# Altium PCB LM2587.PcbDoc
Units mm, origin at the board's own origin, x right, y up, seen from the top; angles counter-clockwise.
Board outline 50 x 35 mm, 2 copper layers (Top Layer, Bottom Layer), stack 1.581 mm thick; 11 components, 7 nets, 30 pads, 52 vias.
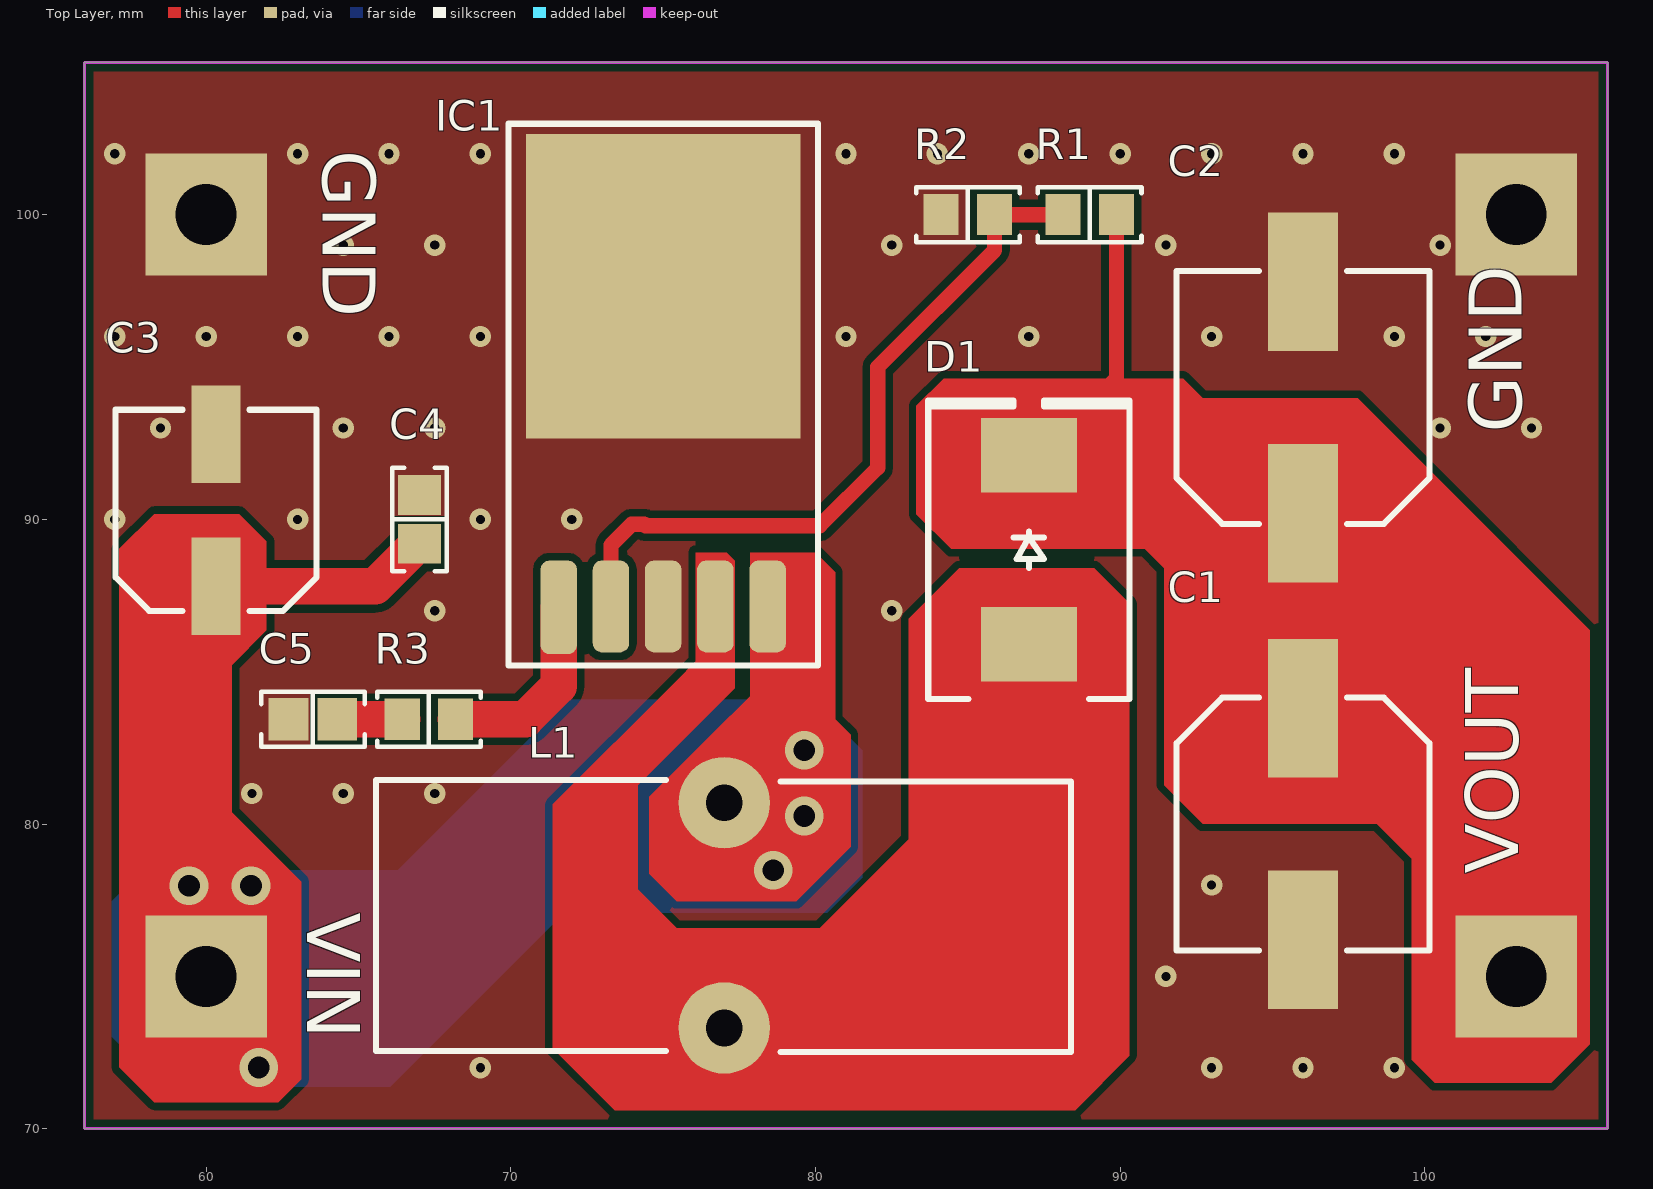
[diagram p0: Top Layer view]
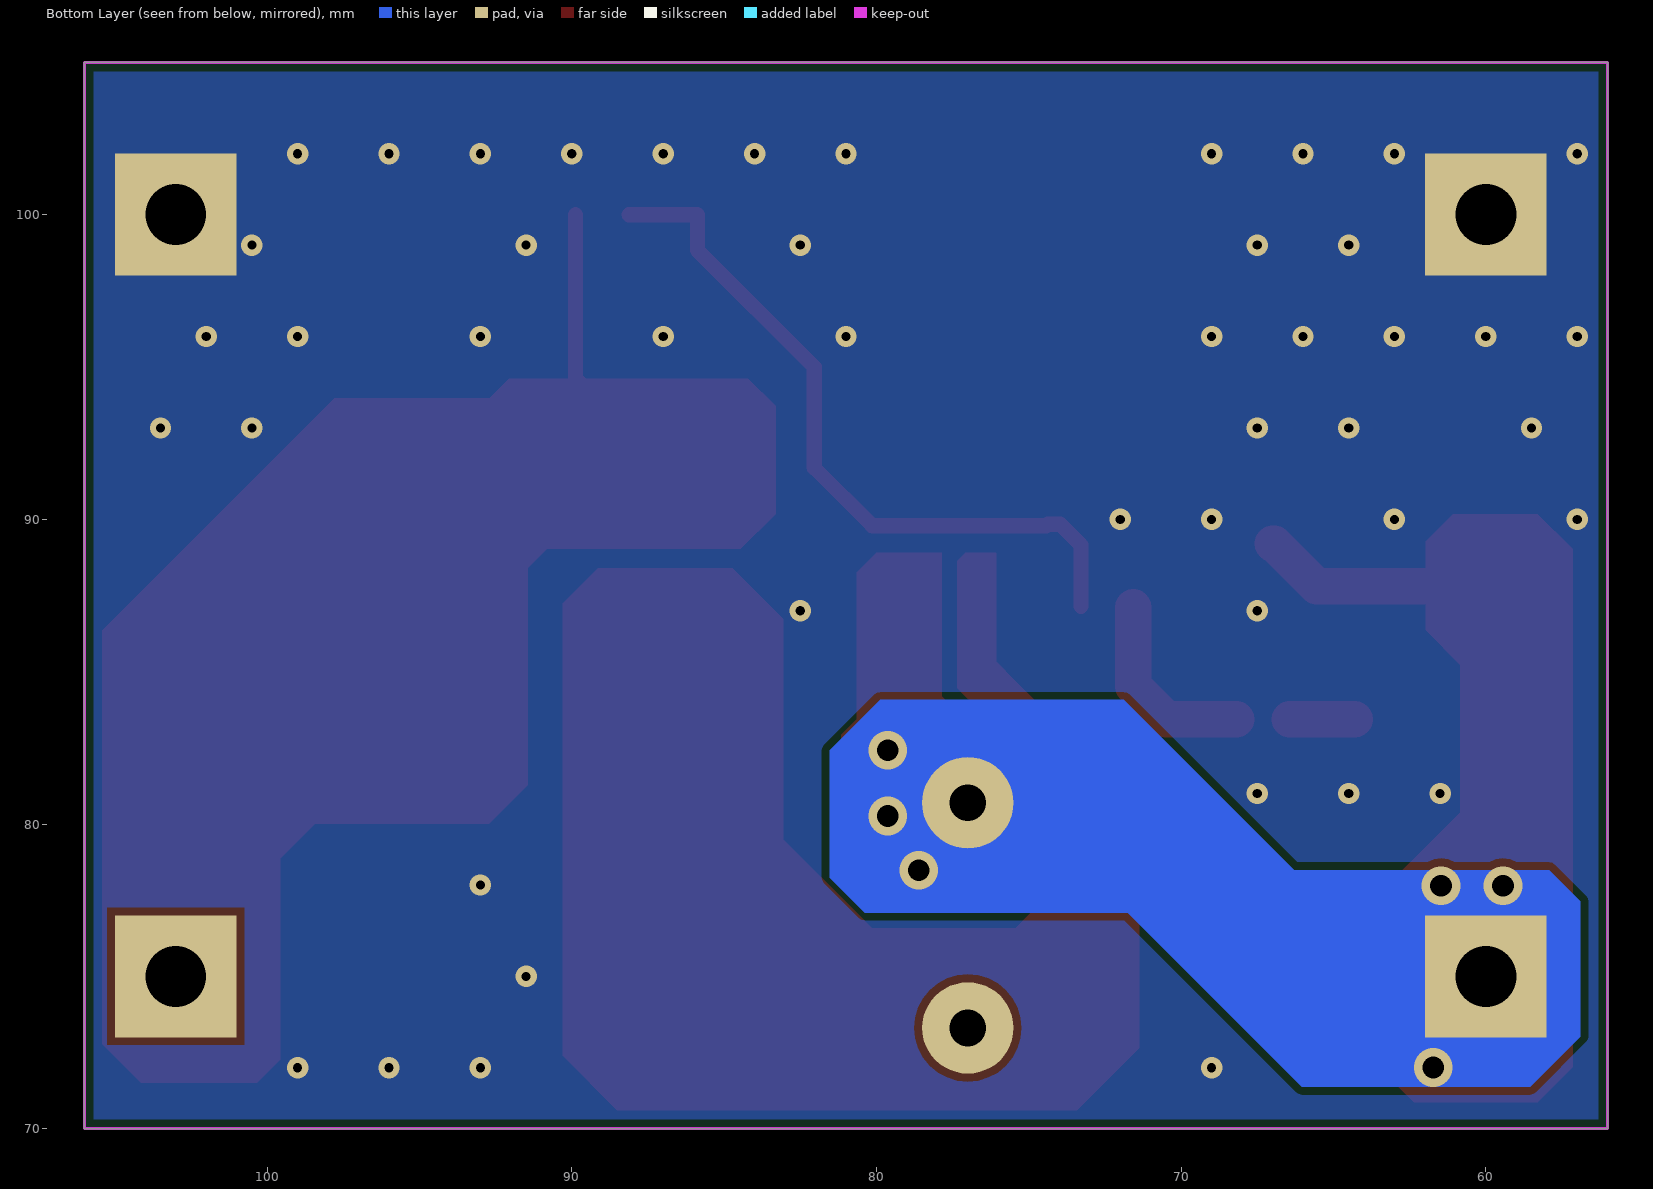
[diagram p1: Bottom Layer view, seen from below]
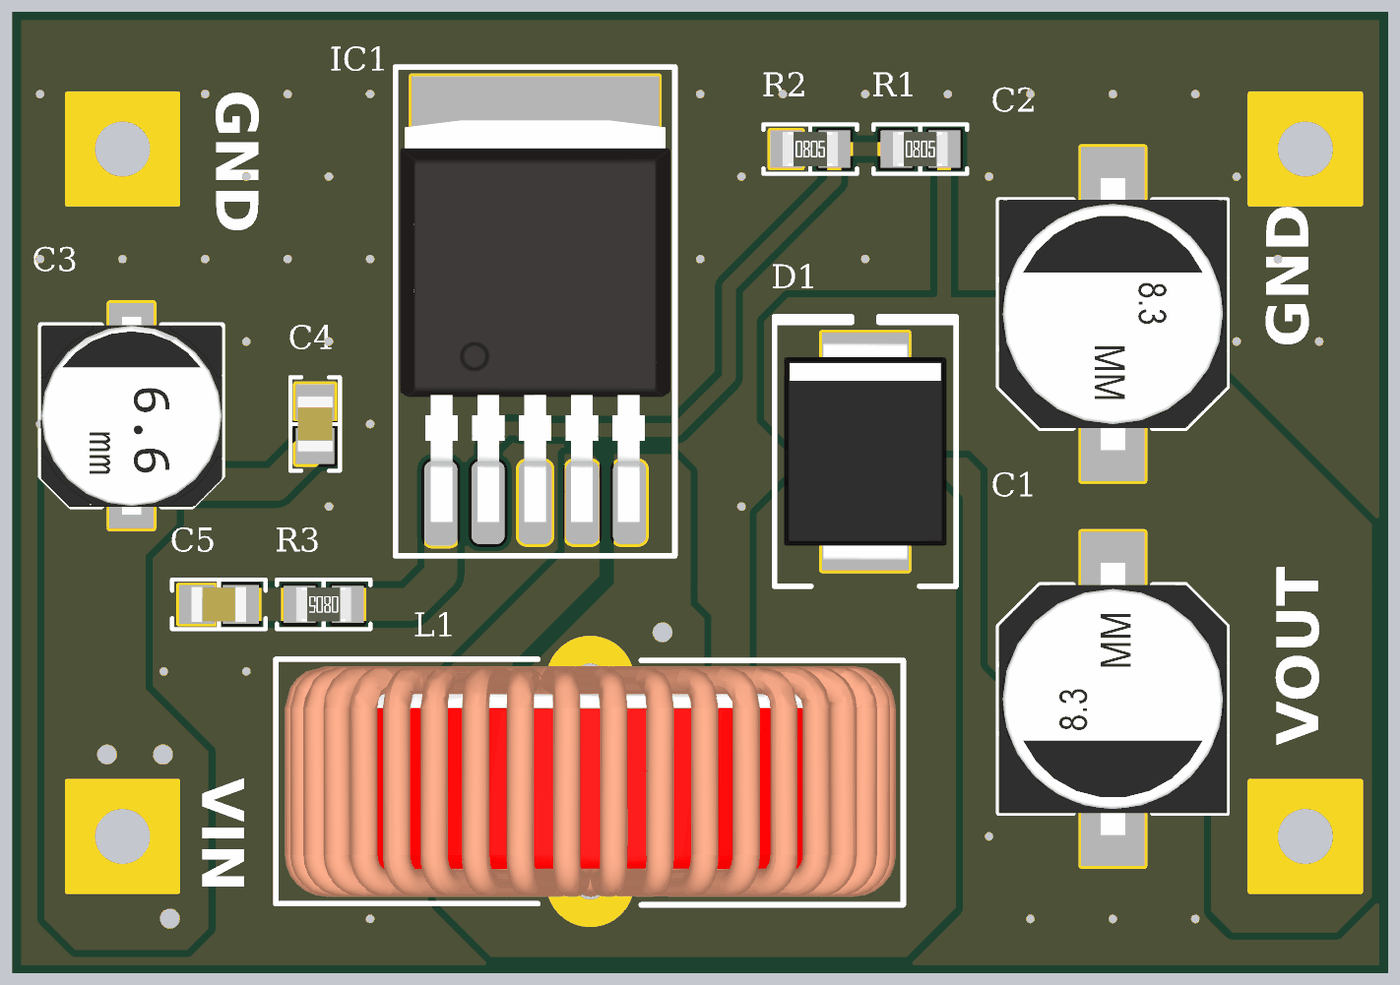
[diagram p2: 3D render of the assembled board from above, using the file's embedded part models]

## Layer stack, top to bottom
Top Solder: solder mask 0.0102, Solder Resist, Dk 3.5
Top Layer: signal copper 0.0356
Dielectric 1: dielectric 1.51, FR-4, Dk 4.8
Bottom Layer: signal copper 0.0356
Bottom Solder: solder mask 0.0102, Solder Resist, Dk 3.5

## Board outline
56,70 56,105 106,105 106,70

## Design rules (kind name [scope] priority, off if disabled: settings)
Clearance Clearance_1 [InPolygon] p1: gap=0.25 ignorepadtopadclearanceinfootprint=FALSE
Clearance [All] p2: gap=0.152 ignorepadtopadclearanceinfootprint=FALSE
PolygonConnect [All] p1: connectstyle=Direct reliefconductorwidth=0.254 reliefentries=4 polygonreliefangle="90 Angle" airgapwidth=0.254
RoutingVias [All] p1: holewidth=0.5 width=0.8 viastyle="Through Hole" minholewidth=0.3 minwidth=0.5 maxholewidth=1 maxwidth=2
SolderMaskExpansion [All] p1: expansion=0.102 istentingtop=FALSE
Width [All] p1: maxlimit=3 minlimit=0.152 preferedwidth=0.5
30 further rules are at their usual default settings.

## Components (designator, comment, footprint, x,y, rotation, side; value= is the part's Value field where it differs from the comment)
C1 "100µF" "CAP ALSMD 8.3MM H10.5MM" 96,80 r270 top
C2 "100µF" "CAP ALSMD 8.3MM H10.5MM" 96,94 r90 top
C3 "56µF" "CAP ALSMD 6.6MM H7.7MM" 60.325,90.297 r90 top
C4 "0.1µF" "CAP 0805_2012" 67,90 r270 top
C5 "0.68µF" "CAP 0805_2012" 63.5,83.439 r0 top
D1 "SURS8360T3G" "DO214AB SMC" 87,89 r90 top
IC1 "LM2587" D2PAK 75,96 r0 top
L1 "100µH" 7447070 77,77 r0 top
R1 "56 kOhms" "RES 0805_2012" 89,100 r0 top
R2 "2 kOhms" "RES 0805_2012" 85,100 r0 top
R3 "3 kOhms" "RES 0805_2012" 67.31,83.439 r180 top

## Footprints (in the part's own frame and the unit in brackets; to place one, negate y for a bottom-side part, rotate by r counter-clockwise, add the part's x,y. Pads: shape width x height; smd on the part's side, far side on the other; paste and mask are expansions set on the pad)
7447070 [mm] "0.984\" Dia x 0.433\" W (25.00mm x 11.00mm)"
  round 3 hole 1.2: 1(0,3.695) 2(0,-3.695)
  silkscreen extent -11.43,-4.49 11.38,4.44, body extent -11.11,-4.19 11.11,4.2, height 22.08
"CAP 0805_2012" [mm] "Chip Capacitor, 2-Leads, Body 2.00x1.20mm, IPC Medium Density"
  rect 1.3x1.4 smd: 1(-0.8,0) 2(0.8,0)
  silkscreen extent -1.7,-0.9 1.7,0.9, body extent -1,-0.64 1,0.64, height 1.26
"CAP ALSMD 6.6MM H7.7MM" [mm] "Aluminum Electrolytic Capacitor, Body 6.60x6.60x7.70mm, IPC Low Density"
  rect 3.2x1.6 smd: 1(-2.5,0) 2(2.5,0)
  silkscreen extent -3.3,-3.3 3.3,3.3, body extent -3.6,-3.3 3.6,3.3, height 7.7
"CAP ALSMD 8.3MM H10.5MM" [mm] "Aluminum Electrolytic Capacitor, Body 8.30x8.30x10.50mm, IPC Low Density"
  rect 4.55x2.3 smd: 1(-3.8,0) 2(3.8,0)
  silkscreen extent -4.15,-4.15 4.15,4.15, body extent -4.95,-4.15 4.95,4.15, height 10.5
D2PAK [mm]
  rrect50% 1.2x3.075 smd: 1(-3.429,-8.89)
  rrect50% 1.2x3.015 smd: 2(-1.714,-8.86) 3(0,-8.86) 4(1.714,-8.86) 5(3.429,-8.86)
  rect 9x10 smd: 3(0,1.651)
  silkscreen extent -5.08,-10.79 5.08,6.98, body extent -4.91,-9.56 4.91,5.04, height 4.22
"DO214AB SMC" [mm] "Molded Diode, 2-Leads, Body 6.85x5.90mm, IPC Medium Density"
  rect 2.45x3.15 smd: 1(-3.1,0) 2(3.1,0)
  silkscreen extent -4.9,-3.3 4.9,3.3, body extent -3.97,-2.95 3.97,2.95, height 2.6
"RES 0805_2012" [mm] "Chip Resistor, 2-Leads, Body 2.00x1.25mm, IPC Medium Density"
  rect 1.15x1.35 smd: 1(-0.875,0) 2(0.875,0)
  silkscreen extent -1.7,-0.9 1.7,0.9, body extent -1,-0.62 1,0.63, height 0.6

## Part data
C1 C2: library part EEE-FK1H101P, "CAP ALUM 100UF 20% 50V SMD", Device Package="Radial, Can - SMD", Lifetime @ Temp.="2000 Hrs @ 105°C", Manufacturer="Panasonic Electronic Components", Operating Temperature="-55°C ~ 105°C", Ratings=AEC-Q200, Ripple Current @ High Frequency="350mA @ 100kHz", Ripple Current @ Low Frequency="262.5mA @ 120Hz", Supplier Part Number 1=PCE3809CT-ND, Tolerance=±20%, Voltage - Rated=50V, Applications=Automotive, Capacitance=100µF, ComponentLink2Description="DigiKey Link", ComponentLink2URL=http://digikey.com/product-detail/en/panasonic-electronic-components/EEE-FK1H101P/PCE3809CT-ND/766185, Height - Seated (Max)="0.413\" (10.50mm)", Impedance="340 mOhms", LastUpdated="2020-09-02 01:25:16", Lifecycle Status=Active, Minimum Order=1, Mounting Type="Surface Mount", Package / Case="Radial, Can - SMD", Packaging=TapeAndReel, Part Number=EEE-FK1H101P, Part Status=Active, PartId=7485, Polarization=Polar, Price=0.25, Series=FK, Size / Dimension="0.315\" Dia (8.00mm)", Supplier 1=DigiKey, Surface Mount Land Size="0.327\" L x 0.327\" W (8.30mm x 8.30mm)"
C3: library part UWD1V560MCL1GS, "CAP ALUM 56UF 20% 35V SMD", Device Package="Radial, Can - SMD", Lifetime @ Temp.="2000 Hrs @ 105°C", Manufacturer=Nichicon, Operating Temperature="-55°C ~ 105°C", Ripple Current @ High Frequency="280mA @ 100kHz", Ripple Current @ Low Frequency="140mA @ 120Hz", Supplier Part Number 1=493-9694-1-ND, Tolerance=±20%, Voltage - Rated=35V, Applications="General Purpose", Capacitance=56µF, ComponentLink1Description=Datasheet, ComponentLink1URL=http://nichicon-us.com/english/products/pdfs/e-uwd.pdf, ComponentLink2Description="DigiKey Link", ComponentLink2URL=http://digikey.com/product-detail/en/nichicon/UWD1V560MCL1GS/493-9694-1-ND/3963026, Height - Seated (Max)="0.303\" (7.70mm)", Impedance="340 mOhms", LastUpdated="2020-09-02 01:25:35", Lifecycle Status=Active, Minimum Order=1, Mounting Type="Surface Mount", Package / Case="Radial, Can - SMD", Packaging=TapeAndReel, Part Number=UWD1V560MCL1GS, Part Status=Active, PartId=8221, Price=0.27, Series=UWD, Size / Dimension="0.248\" Dia (6.30mm)", Supplier 1=DigiKey, Surface Mount Land Size="0.260\" L x 0.260\" W (6.60mm x 6.60mm)"
C4: library part CC0805JRX7R9BB104, "CAP CER 0.1UF 50V X7R 0805", Device Package="0805 (2012 Metric)", Manufacturer=Yageo, Operating Temperature="-55°C ~ 125°C", Supplier Part Number 1=311-1858-1-ND, Temperature Coefficient=X7R, Tolerance=±5%, Voltage - Rated=50V, Applications="General Purpose", Capacitance=0.1µF, ComponentLink1Description=Datasheet, ComponentLink1URL=https://www.yageo.com/upload/media/product/productsearch/datasheet/mlcc/UPY-GPHC_X7R_6.3V-to-50V_18.pdf, ComponentLink2Description="DigiKey Link", ComponentLink2URL=http://digikey.com/product-detail/en/yageo/CC0805JRX7R9BB104/311-1858-1-ND/5195760, LastUpdated="2020-09-02 01:04:41", Lifecycle Status=Active, Minimum Order=1, Mounting Type="Surface Mount, MLCC", Package / Case="0805 (2012 Metric)", Packaging=TapeAndReel, Part Number=CC0805JRX7R9BB104, Part Status=Active, PartId=2626, Price=0.03, Series=CC, Size / Dimension="0.079\" L x 0.049\" W (2.00mm x 1.25mm)", Supplier 1=DigiKey, Thickness (Max)="0.037\" (0.95mm)"
C5: library part C0805C684K5RACTU, "CAP CER 0.68UF 50V X7R 0805", Device Package="0805 (2012 Metric)", Manufacturer=KEMET, Operating Temperature="-55°C ~ 125°C", Supplier Part Number 1=399-8114-1-ND, Temperature Coefficient=X7R, Tolerance=±10%, Voltage - Rated=50V, Applications="Bypass, Decoupling", Capacitance=0.68µF, ComponentLink1Description=Datasheet, ComponentLink1URL=https://api.kemet.com/component-edge/download/datasheet/C0805C684K5RACTU.pdf, ComponentLink2Description="DigiKey Link", ComponentLink2URL=http://digikey.com/product-detail/en/kemet/C0805C684K5RACTU/399-8114-1-ND/3471837, LastUpdated="2020-09-02 01:04:38", Lifecycle Status=Active, Minimum Order=1, Mounting Type="Surface Mount, MLCC", Package / Case="0805 (2012 Metric)", Packaging=TapeAndReel, Part Number=C0805C684K5RACTU, Part Status=Active, PartId=4580, Price=0.07, Series="SMD Comm X7R", Size / Dimension="0.079\" L x 0.049\" W (2.00mm x 1.25mm)", Supplier 1=DigiKey, Thickness (Max)="0.057\" (1.45mm)"
D1: "DIODE GEN PURP 600V 3A SMC", Current - Average Rectified (Io)=3A, Current - Reverse Leakage @ Vr="10µA @ 600V", Manufacturer="ON Semiconductor", Operating Temperature - Junction="-65°C ~ 175°C", Package / Case="DO-214AB, SMC", Supplier Device Package=SMC, Supplier Part Number 1=SURS8360T3GOSCT-ND, Voltage - DC Reverse (Vr) (Max)=600V, Voltage - Forward (Vf) (Max) @ If="1.25V @ 3A", ComponentLink1Description=Datasheet, ComponentLink1URL=http://www.onsemi.com/pub/Collateral/MURS320T3-D.PDF, ComponentLink2Description="DigiKey Link", ComponentLink2URL=http://digikey.com/product-detail/en/on-semiconductor/SURS8360T3G/SURS8360T3GOSCT-ND/9087771, Diode Type=Standard, LastUpdated="2020-09-02 01:18:57", Lifecycle Status=Active, Minimum Order=1, Mounting Type="Surface Mount", Packaging=TapeAndReel, Part Number=SURS8360T3G, Part Status=Active, PartId=348, Price=0.30, Reverse Recovery Time (trr)=75ns, Series=-, Speed="Fast Recovery =< 500ns, > 200mA (Io)", Supplier 1=DigiKey
IC1: "Boost Converter"
L1: library part SRR1280-101M, "FIXED IND 100UH 2.1A 150MOHM SMD", Current - Saturation=2A, Current Rating (Amps)=2.1A, DC Resistance (DCR)="150mOhm Max", Device Package=Nonstandard, Frequency - Self Resonant=4.5MHz, Inductance Frequency - Test=100kHz, Manufacturer="Bourns Inc.", Operating Temperature="-40°C ~ 125°C", Q @ Freq="18 @ 796kHz", Supplier Part Number 1=SRR1280-101MCT-ND, Tolerance=±20%, ComponentLink1Description=Datasheet, ComponentLink1URL=https://www.bourns.com/docs/Product-Datasheets/SRR1280.pdf, ComponentLink2Description="DigiKey Link", ComponentLink2URL=http://digikey.com/product-detail/en/bourns-inc/SRR1280-101M/SRR1280-101MCT-ND/2127046, Height - Seated (Max)="0.315\" (8.00mm)", Inductance=100µH, LastUpdated="2020-09-02 01:22:09", Lifecycle Status=Active, Material - Core=Ferrite, Minimum Order=1, Mounting Type="Surface Mount", Package / Case=Nonstandard, Packaging=TapeAndReel, Part Number=SRR1280-101M, Part Status=Active, PartId=24, Price=0.65, Series=SRR1280, Shielding=Shielded, Size / Dimension="0.492\" L x 0.492\" W (12.50mm x 12.50mm)", Supplier 1=DigiKey, Type=Wirewound
R1: library part RMCF0805FT56K0, "RES 56K OHM 1% 1/8W 0805", Device Package="0805 (2012 Metric)", Manufacturer="Stackpole Electronics Inc", Operating Temperature="-55°C ~ 155°C", Power (Watts)="0.125W, 1/8W", Ratings=AEC-Q200, Supplier Device Package=0805, Supplier Part Number 1=RMCF0805FT56K0CT-ND, Temperature Coefficient=±100ppm/°C, Tolerance=±1%, ComponentLink1Description=Datasheet, ComponentLink1URL=https://www.seielect.com/catalog/sei-packaging.pdf, ComponentLink2Description="DigiKey Link", ComponentLink2URL=http://digikey.com/product-detail/en/stackpole-electronics-inc/RMCF0805FT56K0/RMCF0805FT56K0CT-ND/5049802, Composition="Thick Film", Features="Automotive AEC-Q200", Height - Seated (Max)="0.026\" (0.65mm)", LastUpdated="2020-09-02 01:15:14", Lifecycle Status=Active, Minimum Order=1, Number of Terminations=2, Package / Case="0805 (2012 Metric)", Packaging=CutTape, Part Number=RMCF0805FT56K0, Part Status=Active, PartId=32591, Price=0.10, Resistance="56 kOhms", Series=RMCF, Size / Dimension="0.079\" L x 0.049\" W (2.00mm x 1.25mm)", Supplier 1=DigiKey
R2: library part AC0805FR-072KL, "RES SMD 2K OHM 1% 1/8W 0805", Device Package="0805 (2012 Metric)", Manufacturer=Yageo, Operating Temperature="-55°C ~ 155°C", Power (Watts)="0.125W, 1/8W", Ratings=AEC-Q200, Supplier Device Package=0805, Supplier Part Number 1=YAG3718CT-ND, Temperature Coefficient=±100ppm/°C, Tolerance=±1%, ComponentLink1Description=Datasheet, ComponentLink1URL=https://www.yageo.com/upload/media/product/productsearch/datasheet/rchip/PYu-AC_51_RoHS_L_7.pdf, ComponentLink2Description="DigiKey Link", ComponentLink2URL=http://digikey.com/product-detail/en/yageo/AC0805FR-072KL/YAG3718CT-ND/6006567, Composition="Thick Film", Features="Automotive AEC-Q200, Moisture Resistant", Height - Seated (Max)="0.024\" (0.60mm)", LastUpdated="2020-09-02 01:15:09", Lifecycle Status=Active, Minimum Order=1, Number of Terminations=2, Package / Case="0805 (2012 Metric)", Packaging=TapeAndReel, Part Number=AC0805FR-072KL, Part Status=Active, PartId=34654, Price=0.01, Resistance="2 kOhms", Series=AC, Size / Dimension="0.079\" L x 0.049\" W (2.00mm x 1.25mm)", Supplier 1=DigiKey
R3: library part ERJ-6ENF3001V, "RES SMD 3K OHM 1% 1/8W 0805", Device Package="0805 (2012 Metric)", Manufacturer="Panasonic Electronic Components", Operating Temperature="-55°C ~ 155°C", Power (Watts)="0.125W, 1/8W", Ratings=AEC-Q200, Supplier Device Package=0805, Supplier Part Number 1=P3.0KCCT-ND, Temperature Coefficient=±100ppm/°C, Tolerance=±1%, ComponentLink1Description=Datasheet, ComponentLink1URL=https://industrial.panasonic.com/cdbs/www-data/pdf/RDA0000/AOA0000C304.pdf, ComponentLink2Description="DigiKey Link", ComponentLink2URL=http://digikey.com/product-detail/en/panasonic-electronic-components/ERJ-6ENF3001V/P3.0KCCT-ND/1746847, Composition="Thick Film", Features="Automotive AEC-Q200", Height - Seated (Max)="0.028\" (0.70mm)", LastUpdated="2020-09-02 01:15:19", Lifecycle Status=Active, Minimum Order=1, Number of Terminations=2, Package / Case="0805 (2012 Metric)", Packaging=TapeAndReel, Part Number=ERJ-6ENF3001V, Part Status=Active, PartId=30109, Price=0.01, Resistance="3 kOhms", Series=ERJ, Size / Dimension="0.079\" L x 0.049\" W (2.00mm x 1.25mm)", Supplier 1=DigiKey

## Free pads (board coordinates)
  rect 4x4 hole 2: GND(60,100) GND(103,100) VIN(60,75) VOUT(103,75)

## Via types
v1: diameter 0.7, hole 0.3, Top Layer to Bottom Layer, tented both sides, 46 vias
v2: diameter 1.27, hole 0.711, Top Layer to Bottom Layer, tented both sides, 6 vias

## Nets (pads, with @x,y where several pads share a name; then routed paths per layer and width w, separated by ;. In a path a pad name is that pad's centre, name@x,y a point inside that pad or via, vN(x,y) a via of type N, cw(c..) or ccw(c..) an arc to the next point about the centre after c; other vN are vias at no path point)
GND: C1.2 C2.2 C3.2 C4.1 C5.1 IC1.3 pad.GND R2.1
  other v1: 69,72 93,72 96,72 99,72 91.5,75 93,78 61.5,81 64.5,81 67.5,81 67.5,87 82.5,87 57,90 63,90 69,90 72,90 58.5,93 64.5,93 67.5,93 100.5,93 103.5,93 57,96 60,96 63,96 66,96 69,96 81,96 87,96 93,96 99,96 102,96 64.5,99 67.5,99 82.5,99 91.5,99 100.5,99 57,102 63,102 66,102 69,102 81,102 84,102 87,102 90,102 93,102 96,102 99,102
NetC5_2: C5.2 R3.2 | length 2.1
  Top Layer w1.2: C5.2 R3.2
NetD1_1: D1.1 IC1.4 L1.2
NetIC1_1: IC1.1 R3.1 | length 6.4
  Top Layer w1.2: R3.1 70.485,83.439 71.571,84.525 IC1.1
NetIC1_2: IC1.2 R1.1 R2.2 | length 24
  Top Layer w0.5: IC1.2 73.285,89.16 73.961,89.836 74.375,89.836 74.422,89.789 80.137,89.789 82.042,91.694 82.042,94.996 85.875,98.829 R2.2 R1.1
VIN: C3.1 C4.2 IC1.5 L1.1 pad.VIN | length 7.3
  Top Layer w1.2: C3.1 65.547,87.797 66.95,89.2 C4.2
  other v2: 61.722,72.009 59.436,77.978 61.468,77.978 78.613,78.486 79.629,80.264 79.629,82.423
VOUT: C1.1 C2.1 D1.2 pad.VOUT R1.2 | length 9.3
  Top Layer w0.5: D1.2 87.35,92.1 89.875,94.625 R1.2

## Polygon pours and split planes (outlines as drawn)
GND on Bottom Layer "GND_L02_P000" (solid, pour order 0): 56,105 106,105 106,70 56,70
GND on Top Layer "GND_L01_P002" (solid, pour order 2): 56,105 106,105 106,70 56,70

## Keep-outs
Keep-Out Layer:
  lines w0.1: 56,70 56,105 85,105 106,105 106,70 56,70

## Other copper
Top Layer:
  region net VOUT: 100.33,91.44 105.41,86.36 105.41,72.771 104.14,71.501 100.33,71.501 99.568,72.263 99.568,78.867 98.425,80.01 98.425,87.63
  region net VIN: 57.15,89.027 58.293,90.17 61.087,90.17 61.976,89.281 61.976,86.36 60.833,85.217 60.833,80.391 63.119,78.105 63.119,71.628 62.357,70.866 58.293,70.866 57.15,72.009
  region net NetD1_1: 76.073,88.9 77.089,88.9 77.343,88.646 77.343,84.455 74.168,81.28 74.168,77.851 75.438,76.581 80.137,76.581 83.058,79.502 83.058,86.741 84.709,88.392 89.154,88.392 90.297,87.249 90.297,72.39 88.519,70.612 73.406,70.612 71.374,72.644 71.374,80.645 75.438,84.709 76.073,85.344
  region net VIN: 77.851,88.9 80.01,88.9 80.645,88.265 80.645,83.439 81.153,82.931 81.153,79.248 79.375,77.47 75.438,77.47 74.549,78.359 74.549,80.899 76.581,82.931 77.851,84.201
  region net VOUT: 92.075,94.615 92.71,93.98 97.79,93.98 100.33,91.44 100.33,81.915 98.425,80.01 92.71,80.01 91.44,81.28 91.44,88.392 90.805,89.027 84.455,89.027 83.312,90.17 83.312,93.726 84.201,94.615
Bottom Layer:
  region net VIN: 57.912,78.486 66.294,78.486 71.882,84.074 79.883,84.074 81.534,82.423 81.534,78.232 80.391,77.089 71.755,77.089 66.04,71.374 58.547,71.374 56.896,73.025 56.896,77.47

## Silkscreen, mask and mechanical layers (free items; w line width, h text height)
Top Overlay:
  text "GND" at 63.246,102.108 h3 r270
  text "GND" at 103.759,92.837 h3 r90
  text "VOUT" at 103.632,78.359 h3 r90
  text "VIN" at 62.738,77.089 h3 r270